# Altium PCB WDUExtensionBoard.PcbDoc
Units mm, origin at the board's own origin, x right, y up, seen from the top; angles counter-clockwise.
Board outline 97 x 22 mm, 2 copper layers (Top Layer, Bottom Layer); 36 components, 40 nets, 141 pads, 24 vias.
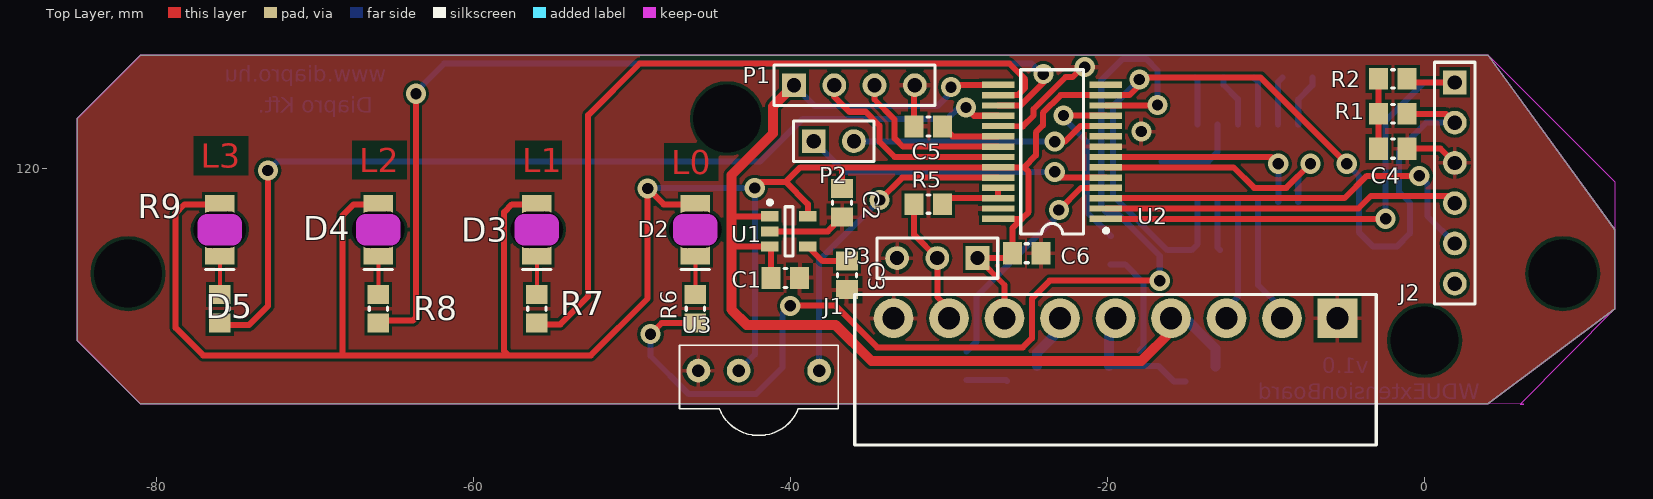
[diagram p0: Top Layer view]
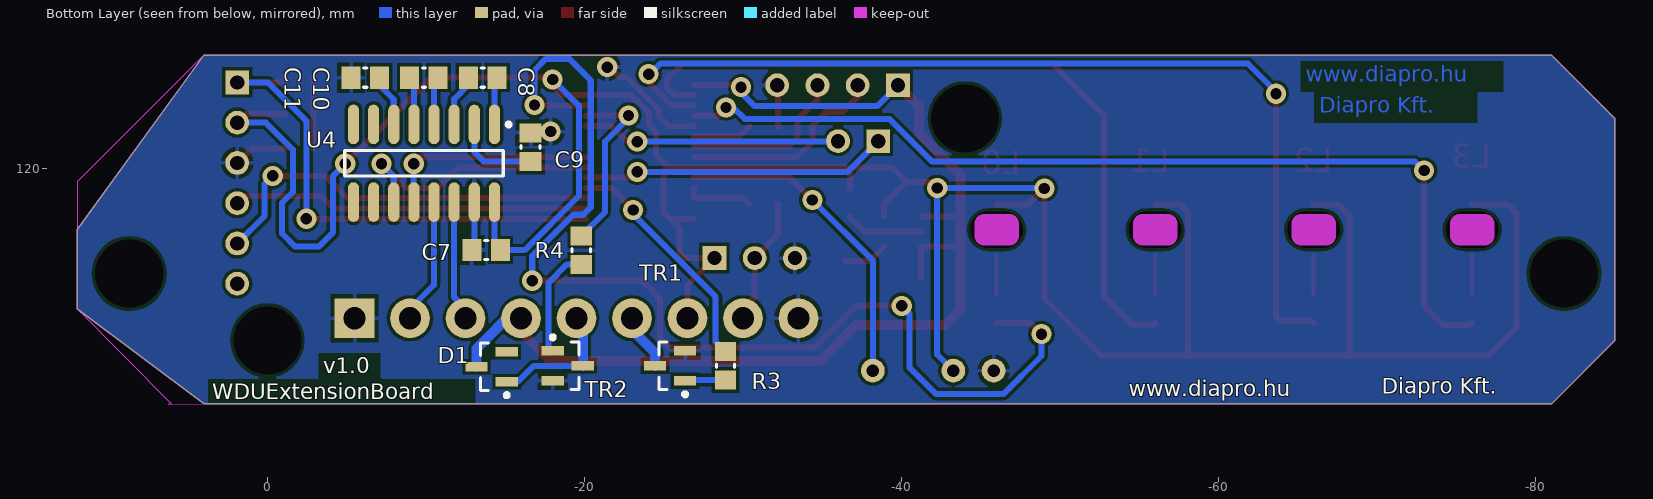
[diagram p1: Bottom Layer view, seen from below]

## Layer stack, top to bottom
Top Layer: signal copper 0.0356
Dielectric: dielectric 0.32, FR-4, Dk 4.8
Bottom Layer: signal copper 0.0356

## Board outline
-85,109.123 -85,123.123 -81,127.123 4,127.123 12,116.123 12,111.123 4,105.123 -81,105.123

## Design rules (kind name [scope] priority, off if disabled: settings)
AssemblyTestPointUsage [All] p1: valid=2
Clearance [Not OnLayer('Keep-Out Layer') vs Not OnLayer('Keep-Out Layer')] p1: gap=0.2
ComponentClearance [All] p1: gap=0 collisioncheckmode=3 verticalgap=0.254 showdistances=TRUE
FabricationTestpoint [All] p1 off: side=3 testpointundercomponent=TRUE minsize=1.016 maxsize=2.54 preferedsize=1.524 minholesize=0 maxholesize=1.016 preferedholesize=0.813 testpointgrid=0.025 allowsidetop=TRUE allowsidebottom=TRUE usegrid=TRUE gridtolerance=0
HoleSize [All] p1: absolutevalues=TRUE maxlimit=3.6 minlimit=0.025 maxpercent=80.000 minpercent=20.000
MinimumSolderMaskSliver [All] p1: minsoldermaskwidth=0
PolygonConnect [All] p1: connectstyle=Relief reliefconductorwidth=0.254 reliefentries=4 polygonreliefangle="90 Angle"
RoutingVias [All] p1: holewidth=0.254 width=0.762 viastyle="Through Hole" minholewidth=0.254 minwidth=0.762 maxholewidth=2.54 maxwidth=2.54
SilkToSilkClearance [All] p1: silktosilkclearance=0.1
SilkscreenOverComponentPads [IsPad] p1: minsilkscreentomaskgap=0.1
SolderMaskExpansion [All] p1: expansion=0.102
Width [All] p1: maxlimit=1.2 minlimit=0.254 preferedwidth=0.254 minimp=50.000000 maximp=50.000000 favimp=50.000000
21 further rules are at their usual default settings.

## Components (designator, comment, footprint, x,y, rotation, side; value= is the part's Value field where it differs from the comment)
C1 "CAP" "0805 CAP" -40.32,113.073 r180 top
C2 "CAP" "0805 CAP" -36.75,117.803 r90 top
C3 "CAP" "0805 CAP" -36.44,113.233 r90 top
C4 "CAP" "0805 CAP" -2,121.223 r180 top
C5 "CAP" "0805 CAP" -31.3,122.623 r180 top
C6 "CAP" "0805 CAP" -25.1,114.623 r180 top
C7 "CAP" "0805 CAP" -13.8,114.823 r0 bottom
C8 "CAP" "0805 CAP" -13.578,125.701 r180 bottom
C9 "CAP" "0805 CAP" -16.6,121.323 r90 bottom
C10 "CAP" "0805 CAP" -9.878,125.701 r0 bottom
C11 "CAP" "0805 CAP" -6.178,125.701 r0 bottom
D1 "BAV99" SOT23 -14.15,107.473 r0 bottom
D2 "LED 0" "1206 LED Reversed" -46,116.107 r90 top
D3 "LED 1" "1206 LED Reversed" -56,116.107 r90 top
D4 "LED 2" "1206 LED Reversed" -66,116.107 r90 top
D5 "LED 3" "1206 LED Reversed" -76,116.107 r90 top
J1 "OUTPUT" "Euroblock 3.5pitch 9P" -5.5,110.523 r180 top
J2 "PIC_Kit" HDR1X6 1.9,125.403 r270 top
P1 "USB" HDR1X4 -39.78,125.223 r0 top
P2 "Watchdog" HDR1X2 -38.54,121.693 r0 top
P3 "Ext" HDR1X3 -28.2,114.323 r180 top
R1 "RES" "0805 RES" -2,123.423 r0 top
R2 "RES" "0805 RES" -2,125.623 r180 top
R3 "RES" "0805 RES" -28.9,107.523 r90 bottom
R4 "RES" "0805 RES" -19.8,114.823 r90 bottom
R5 "RES" "0805 RES" -31.3,117.723 r0 top
R6 "RES" "0805 RES" -46,111.123 r270 top
R7 "RES" "0805 RES" -56,111.123 r270 top
R8 "RES" "0805 RES" -66,111.123 r270 top
R9 "RES" "0805 RES" -76,111.123 r270 top
TR1 "BC846" SOT23 -25.4,107.523 r0 bottom
TR2 "BC846" SOT23 -18.95,107.523 r180 bottom
U1 "LP3985IM5-3.3" MF05A_N -40.1,116.003 r0 top
U2 "PIC24FJ64GB002-I/SO" SSOP-28 -23.5,121.023 r90 top
U3 "TSOP1736" TSOP17xx -42,107.223 r0 top
U4 "MAX3232CSE" NSO16_M -9.878,120.301 r270 bottom

## Footprints (in the part's own frame and the unit in brackets; to place one, negate y for a bottom-side part, rotate by r counter-clockwise, add the part's x,y. Pads: shape width x height; smd on the part's side, far side on the other; paste and mask are expansions set on the pad)
"0805 CAP" [mm] "Chip Capacitor, 2-Leads, Body 2,0x1,3mm, IPC Medium Density"
  rect 1.2x1.4 smd: 1(-0.9,0) 2(0.9,0)
  silkscreen extent -0.1,-0.6 0.1,0.6, body extent -1.05,-0.67 1.05,0.67, height 1
"0805 RES" [mm] "Chip Resistor, 2-Leads, Body 2,0x1,3mm, IPC Medium Density"
  rect 1.2x1.35 smd: 1(-0.9,0) 2(0.9,0)
  silkscreen extent -0.1,-0.58 0.1,0.58, body extent -1.05,-0.67 1.05,0.67, height 1
"1206 LED Reversed" [mm] "1206 Green LED"
  rect 1.2x1.85 smd: 1(1.6,0) 2(-1.6,0)
  Keep-Out Layer lines w1.2: -0.4,0.8 -0.4,-0.8 0.4,-0.8 0.4,0.8 -0.4,0.8
  silkscreen extent -2.5,-0.9 -2.5,0.9, body extent -1.6,-0.8 1.6,0.8, height 0.5
"Euroblock 3.5pitch 9P" [mm] "3.5 mm pitch 9P connector"
  rect 2.5x2.5 hole 1.4: 1(0,0)
  round 2.5 hole 1.4 mask+0.102: 2(3.5,0) 3(7,0) 4(10.5,0) 5(14,0) 6(17.5,0) 7(21,0) 8(24.5,0) 9(28,0)
  silkscreen extent -2.45,-1.5 30.45,8, body extent -2.45,-1.5 30.45,8, height 7.2
HDR1X2 [mm] "Connector; Header; 2 Position"
  rect 1.5x1.5 hole 0.9: 1(0,0)
  round 1.5 hole 0.9: 2(2.54,0)
  silkscreen extent -1.27,-1.27 3.81,1.27
HDR1X3 [mm] "Connector; Header; 3 Position"
  rect 1.5x1.5 hole 0.9: 1(0,0)
  round 1.5 hole 0.9: 2(2.54,0) 3(5.08,0)
  silkscreen extent -1.27,-1.27 6.35,1.27
HDR1X4 [mm] "Connector; Header; 4 Position"
  rect 1.5x1.5 hole 0.9: 1(0,0)
  round 1.5 hole 0.9: 2(2.54,0) 3(5.08,0) 4(7.62,0)
  silkscreen extent -1.27,-1.27 8.89,1.27
HDR1X6 [mm] "Connector; Header; 6 Position"
  rect 1.5x1.5 hole 0.9: 1(0,0)
  round 1.5 hole 0.9: 2(2.54,0) 3(5.08,0) 4(7.62,0) 5(10.16,0) 6(12.7,0)
  silkscreen extent -1.27,-1.27 13.97,1.27
MF05A_N [mm] "SOT23, 5-Leads, Body 2.9x1.6mm, Pitch 0.95mm, Lead Span 2.8mm, IPC Medium Density"
  rect 1.1x0.65 smd: 1(-1.2,0.95) 2(-1.2,0) 3(-1.2,-0.95) 4(1.2,-0.95) 5(1.2,0.95)
  silkscreen extent -1.32,-1.55 0.25,1.95, body extent -0.9,-1.55 0.9,1.55, height 1.19
NSO16_M [mm] "SOIC, 16-Leads, Body 9.9x3.9mm, Pitch 1.27mm, IPC Low Density"
  oval 2.5x0.7 smd: 1(-2.45,4.445) 2(-2.45,3.175) 3(-2.45,1.905) 4(-2.45,0.635) 5(-2.45,-0.635) 6(-2.45,-1.905) 7(-2.45,-3.175) 8(-2.45,-4.445) 9(2.45,-4.445) 10(2.45,-3.175) 11(2.45,-1.905) 12(2.45,-0.635) 13(2.45,0.635) 14(2.45,1.905) 15(2.45,3.175) 16(2.45,4.445)
  silkscreen extent -2.57,-5 0.8,5.47, body extent -2,-5 2,5, height 1.75
SOT23 [mm] "SOT23, 3-Leads, Body 3,0x2,5mm (max), Pitch 0,95mm, IPC Medium Density"
  rect 1.4x0.6 smd: 1(-0.95,0.95) 2(-0.95,-0.95) 3(0.95,0)
  silkscreen extent -1.07,-1.5 0.7,1.92, body extent -0.7,-1.5 0.7,1.5, height 1.1
SSOP-28 [mm] "SSOP, Plastic; 28 Leads; Body Width 5.2 mm; Pitch 0.65 mm"
  rect 0.4x2.05 smd: 1(-4.225,-3.4) 2(-3.575,-3.4) 3(-2.925,-3.4) 4(-2.275,-3.4) 5(-1.625,-3.4) 6(-0.975,-3.4) 7(-0.325,-3.4) 8(0.325,-3.4) 9(0.975,-3.4) 10(1.625,-3.4) 11(2.275,-3.4) 12(2.925,-3.4) 13(3.575,-3.4) 14(4.225,-3.4) 15(4.225,3.4) 16(3.575,3.4) 17(2.925,3.4) 18(2.275,3.4) 19(1.625,3.4) 20(0.975,3.4) 21(0.325,3.4) 22(-0.325,3.4) 23(-0.975,3.4) 24(-1.625,3.4) 25(-2.275,3.4) 26(-2.925,3.4) 27(-3.575,3.4) 28(-4.225,3.4)
  silkscreen extent -5.18,-3.52 5.17,1.98, body extent -5.1,-2.7 5.1,2.7, height 2
TSOP17xx [mm] "TSOP17xx IR Receiver"
  round 1.5 hole 0.8: 1(-3.81,0) 2(-1.27,0) 3(3.81,0)
  silkscreen extent -5,-4.09 5,1.6, body extent -5,-4.1 5,1.6, height 13.3

## Part data
C1 C2 C3 C4 C5 C6 C7 C8 C9 C10 C11: "Capacitor"
D1: "Dual Schottky series - 0.2A, 75V"
D2 D3 D4 D5: library part LED2, "Typical RED, GREEN, YELLOW, AMBER GaAs LED"
J1: library part "Euroblock 9P connector"
J2: "PIC Kit connector"
P1: library part "Header 4", "Header, 4-Pin"
P2: library part "Header 2", "Header, 2-Pin"
P3: library part "Header 3", "Header, 3-Pin"
R1 R2 R3 R4 R5 R6 R7 R8 R9: "Resistor"
TR1 TR2: "NPN Transistor, 80 V, SOT23"
U1: "Micropower, 150mA Low-Noise Ultra Low-Dropout CMOS Voltage Regulator"
U2: "16-Bit Flash Microcontroller with USB On-The-Go and nanoWatt XLP, 64KB Flash, 8KB SRAM, 28-Pin SOIC, Industrial Temperature"
U3: library part TSOP17xx, "IR Receiver, 3-Pin"
U4: "3.0V TO 5.5V, Low-Power, up to 1Mbps, True RS-232 Transceiver Using Four 0.1µF External Capacitor"

## Free pads (board coordinates)
  round 1.524 hole 4.3: 0(-81.79,113.343) 0(-44,123.123) 0(0,109.123) 0(8.71,113.343)
  oct 2x1.524 hole 2.3 slot 3.3 at 0.7 deg: 0(-76,116.107) 0(-66,116.107) 0(-56,116.107) 0(-46,116.107)

## Via types
v1: diameter 1.27, hole 0.711, Top Layer to Bottom Layer, 24 vias

## Nets (pads, with @x,y where several pads share a name; then routed paths per layer and width w, separated by ;. In a path a pad name is that pad's centre, name@x,y a point inside that pad or via, vN(x,y) a via of type N, cw(c..) or ccw(c..) an arc to the next point about the centre after c; other vN are vias at no path point)
D+: P1.3 U2.21 | length 10.6
  Top Layer w0.381: P1.3 -34.7,124.323 -33.43,123.053 -33.43,121.873 -32.905,121.348 U2.21
D-: P1.2 U2.22 | length 13.2
  Top Layer w0.381: P1.2 -37.24,124.503 -36.289,123.552 -35.259,123.552 -34.386,122.679 -34.386,121.649 -33.435,120.698 U2.22
DAT: J1.8 P3.2 R5.1 | length 7.5
  Top Layer w0.381: R5.1 -32.2,115.783 P3.2 -30.74,111.863 J1.8@-30,111.123
GND: C1.1 C2.1 C3.1 C4.1 C5.2 C6.1 C7.2 C9.2 C11.2 J1.1 J1.9 J2.3 P1.4 P3.3 TR1.2 TR2.2 U1.2 U2.8 U2.19 U2.27 U3.1 U4.15 | length 21.2
  Top Layer w0.381: U1.2 -37.65,116.003 C2.1 ; C5.2 -32.2,125.183 P1.4 ; U2.19 -25.34,122.633 -24.661,123.312 -24.661,123.724 -22.642,125.743 -22.21,125.743 -21.59,126.363 v1(-21.44,126.363) ; C4.1 1,121.223 J2.3
  Bottom Layer w0.381: U4.15 -13.053,114.976 C7.2
  other v1: -17.868,122.301
"INFRA IN": U2.24 U3.3 | length 20.4
  Top Layer w0.381: v1(-34.378,117.983) -32.963,119.398 U2.24
  Bottom Layer w0.381: U3.3 -38.19,114.171 v1(-34.378,117.983)
IR: R3.2 U2.4 | length 14.9
  Top Layer w0.381: v1(-23.075,117.348) -21.675,118.748 U2.4
  Bottom Layer w0.381: R3.2 -28.282,109.041 -28.282,111.887 -23.075,117.094 v1(-23.075,117.348)
IR_OUT: J1.6 TR1.3 | length 4.2
  Bottom Layer w0.635: TR1.3 -24.45,108.353 -23,109.803 J1.6@-23,111.123
LED_0: R6.2 U2.12 | length 71
  Top Layer w0.381: v1(-48.832,109.521) -48.13,110.223 R6.2 ; v1(-40.02,111.307) -40.02,111.333 -37.17,111.333 -34.53,108.693 -25.34,108.693 -24.78,109.253 -24.78,111.763 -23.65,112.893 v1(-16.71,112.893) ; U2.12 -16.825,123.948 v1(-16.85,123.973)
  Bottom Layer w0.381: v1(-48.832,109.521) -48.832,108.145 -46.44,105.753 -42.17,105.753 -40.51,107.413 -40.51,110.817 v1(-40.02,111.307) ; v1(-16.85,123.973) -16.85,126.162 -17.57,126.883 -19.05,126.883 -20.4,125.533 -20.4,117.523 -19.93,117.053 -19.303,117.053 -16.71,114.46 v1(-16.71,112.893) v1@-16.34,112.893
LED_1: R7.2 U2.16 | length 47.2
  Top Layer w0.381: R7.2 -55.92,110.143 -54.52,110.143 -52.76,111.903 -52.76,123.343 -49.51,126.593 -26.2,126.593 -25.2,125.593 -25.2,125.055 -25.657,124.598 U2.16
LED_2: R8.2 U2.17 | length 61.5
  Top Layer w0.381: R8.2 -65.83,110.393 -63.81,110.393 -63.63,110.573 v1(-63.63,124.683) ; U2.17 -25.485,123.948 -24.03,125.403 -24.03,125.623 -23.95,125.703 v1@-23.95,125.743
  Bottom Layer w0.381: v1(-63.63,124.683) -63.71,124.683 -63.71,124.733 -61.86,126.583 -24.79,126.583 v1@-23.95,125.743
  other v1: -24.05,125.923
LED_3: R9.2 U2.18 | length 60.1
  Top Layer w0.381: R9.2 -75.87,110.093 -74.17,110.093 -72.95,111.313 -72.95,119.863 v1(-72.97,119.843) ; v1(-28.93,123.813) -28.415,123.298 U2.18
  Bottom Layer w0.381: v1(-72.97,119.843) -72.97,119.823 -72.39,120.403 -41.93,120.403 -39.23,123.103 -30.11,123.103 -29.4,123.813 v1(-28.93,123.813)
M\C\L\R\: J2.1 R2.1 U2.1 | length 32.3
  Top Layer w0.381: U2.1 v1(-2.459,116.798) ; R2.1 -0.88,125.403 J2.1
  Bottom Layer w0.381: v1(-2.459,116.798) -2.459,122.978 -0.034,125.403 J2.1
NetC3_2: C3.2 U1.4 | length 2.8
  Top Layer w0.381: U1.4 -37.98,114.133 C3.2
NetC4_2: C4.2 R1.1 R2.2 | length 4.4
  Top Layer w0.381: C4.2 R2.2
NetC5_1: C5.1 U2.20 | length 3.8
  Top Layer w0.381: C5.1 -29.775,121.998 U2.20
NetC8_1: C8.1 U4.3 | length 3.3
  Bottom Layer w0.381: C8.1 -12.678,125.239 -11.783,124.344 U4.3
NetC8_2: C8.2 U4.1 | length 3
  Bottom Layer w0.381: C8.2 -14.323,125.546 U4.1
NetC9_1: C9.1 U4.2 | length 5.5
  Bottom Layer w0.381: C9.1 -13.65,120.423 -13.053,121.02 U4.2
NetC10_1: C10.1 U4.4 | length 3.1
  Bottom Layer w0.381: C10.1 -10.513,125.436 U4.4
NetC10_2: C10.2 U4.5 | length 3.1
  Bottom Layer w0.381: U4.5 -9.243,125.436 C10.2
NetC11_1: C11.1 U4.6 | length 3.3
  Bottom Layer w0.381: U4.6 -7.973,124.322 -7.078,125.217 C11.1
NetD2_2: D2.2 R6.1 | length 2.5
  Top Layer w0.254: R6.1 D2.2
NetD3_2: D3.2 R7.1 | length 2.5
  Top Layer w0.254: R7.1 D3.2
NetD4_2: D4.2 R8.1 | length 2.5
  Top Layer w0.254: R8.1 D4.2
NetD5_2: D5.2 R9.1 | length 2.5
  Top Layer w0.254: R9.1 D5.2
NetR3_1: R3.1 TR1.1 | length 2.6
  Bottom Layer w0.381: R3.1 -26.4,106.623 TR1.1
NetR4_1: R4.1 TR2.1 | length 6.9
  Bottom Layer w0.381: R4.1 -18.888,113.923 -17.741,112.776 -17.741,108.732 TR2.1
NetR5_2: R5.2 U2.25 U2.26 | length 4.3
  Top Layer w0.381: R5.2 -30.025,118.098 U2.26 U2.25
PGEC: J2.5 U2.3 | length 25.5
  Top Layer w0.381: U2.3 -5.053,118.098 -3.644,119.507 v1(-0.342,119.507)
  Bottom Layer w0.381: v1(-0.342,119.507) 0.166,118.999 0.166,116.977 J2.5
PGED: J2.4 U2.2 | length 22.5
  Top Layer w0.381: U2.2 -4.179,117.448 -3.39,118.237 1.446,118.237 J2.4
REL: R4.2 U2.11 | length 11.8
  Top Layer w0.381: v1@-22.948,123.317 -20.119,123.317 U2.11
  Bottom Layer w0.381: v1@-22.948,123.317 -21.297,121.666 -21.297,117.22 R4.2
  other v1: -22.778,123.317
REL_OUT: D1.1 J1.5 TR2.3 | length 9
  Bottom Layer w0.381: TR2.3 -16.806,107.523 -15.806,106.523 D1.1
  Bottom Layer w0.635: TR2.3 -19.9,110.723 J1.5@-19.5,111.123
RXD: U2.7 U4.12 | length 13.5
  Top Layer w0.381: U2.7 -9.661,120.698 v1(-9.232,120.269)
  Bottom Layer w0.381: U4.12 -9.232,117.862 v1(-9.232,120.269)
RXDH_2: J1.2 U4.13 | length 7.4
  Bottom Layer w0.381: U4.13 -10.513,112.636 J1.2@-9,111.123
TXD: U2.6 U4.11 | length 16.8
  Top Layer w0.381: U2.6 -12.059,120.048 -10.756,118.745 -8.724,118.745 v1(-7.2,120.269)
  Bottom Layer w0.381: U4.11 -7.973,119.496 v1(-7.2,120.269)
TXDH_3: J1.3 U4.14 | length 7
  Bottom Layer w0.381: J1.3@-12.5,111.123 -11.783,111.84 U4.14
VCC3.3V: C2.2 C6.2 C7.1 D2.1 D3.1 D4.1 D5.1 J1.7 J2.2 P3.1 R1.2 U1.5 U2.13 U2.23 U2.28 U3.2 U4.16 | length 195.8
  Top Layer w0.381: D5.1 -78.226,117.707 -78.78,117.153 -78.78,109.913 -77.05,108.183 -68.25,108.183 ; D4.1 -67.556,117.707 -68.25,117.013 -68.25,108.183 ; D3.1 -57.576,117.707 -58.06,117.223 -58.06,108.453 -57.79,108.183 ; D2.1 -48.004,117.707 v1(-49.01,118.713) -49.01,111.773 -52.6,108.183 -57.79,108.183 ; v1@-42.5,118.497 v1(-42.252,118.745) -41.874,119.123 -40.3,119.123 ; U1.5 -38.9,117.723 -40.3,119.123 ; C2.2 -36.75,120.048 ; J1.7@-26.9,111.523 -26.5,111.123 -26.5,112.623 P3.1 -26.3,114.323 C6.2 -26,116.201 -25.403,116.798 ; U2.28 -25.403,116.798 ; v1(-4.914,120.269) -10.368,125.723 -17.494,125.723 -18.619,124.598 U2.13 -22.965,124.598 -24.08,123.483 -24.08,122.693 -24.52,122.253 -24.52,120.795 -25.267,120.048 ; R1.2 1.34,123.423 J2.2 ; -68.25,108.183 -57.79,108.183 ; -40.3,119.123 -39.375,120.048 -36.75,120.048 ; -36.75,120.048 U2.23 -25.267,120.048 ; -25.403,116.798 -24.98,117.221 -24.98,119.761 -25.267,120.048
  Bottom Layer w0.381: v1(-49.01,118.713) -48.978,118.745 v1(-42.252,118.745) -42.252,108.241 U3.2 ; v1(-17.995,125.587) -19.646,123.936 -19.646,118.237 -16.232,114.823 C7.1 -14.323,115.2 U4.16 ; v1(-4.914,120.269) -4.152,119.507 -4.152,115.951 -3.263,115.062 -1.739,115.062 -0.923,115.878 -0.923,117.802 -1.612,118.491 -1.612,121.158 0.093,122.863 J2.2
VCC5V: C1.2 D1.3 J1.4 P1.1 U1.1 U1.3 U2.15 | length 73.2
  Top Layer w0.381: -43.72,115.193 -43.58,115.053 U1.3 -41.22,114.973 C1.2 ; -43.72,116.933 -43.7,116.953 U1.1 ; v1@-29.87,125.248 U2.15
  Top Layer w0.635: P1.1 -41.109,123.894 -41.109,122.174 -43.72,119.563 -43.72,116.933 -43.72,115.193 -43.72,111.069 -42.76,110.109 -37.172,110.109 -34.886,107.823 -17.868,107.823 -16,109.691 J1.4@-16,111.123
  Bottom Layer w0.381: P1.1 -38.46,123.903 -36.531,123.903 -32.63,123.903 -30.744,123.903 -29.87,124.777 v1@-29.87,125.253
  Bottom Layer w0.635: J1.4@-16,111.123 -15.707,111.123 -13.2,108.616 D1.3
  other v1: -29.88,125.103
WD_IN: P2.1 U2.5 | length 19.4
  Top Layer w0.381: v1(-23.329,119.761) -22.966,119.398 U2.5
  Bottom Layer w0.381: P2.1 -36.608,119.761 v1(-23.329,119.761)
WD_OUT: P2.2 U2.10 | length 15.5
  Top Layer w0.381: v1(-23.329,121.666) -22.694,121.666 -21.712,122.648 U2.10
  Bottom Layer w0.381: -35.243,121.666 v1(-23.329,121.666)
pads on no net: D1.2 J2.6 U2.9 U2.14 U4.7 U4.8 U4.9 U4.10

## Polygon pours and split planes (outlines as drawn)
GND on Top Layer "Bottom Layer-No Net" (solid, pour order 8): 4.01,127.109 12,119.119 12,116.093 11.99,116.083 11.99,111.116 6.005,105.131 4.01,105.131 4.008,105.133 -81.01,105.133 -85,109.123 -85,109.163 -84.99,109.173 -84.99,123.133 -81,127.123 -80.99,127.123
GND on Bottom Layer "Bottom Layer-No Net" (solid, pour order 9): 4.01,127.109 12,119.119 12,116.093 11.99,116.083 11.99,111.116 6.005,105.131 4.01,105.131 4.008,105.133 -81.01,105.133 -85,109.123 -85,109.163 -84.99,109.173 -84.99,123.133 -81,127.123 -80.99,127.123

## Keep-outs
Keep-Out Layer:
  pour cut-out: 12,116.123 4,127.123 12,119.133
  pour cut-out: 4,105.123 12,111.123 6.03,105.093 6.24,105.113
  lines w0.1: -85,109.123 -85,123.123 -81,127.123 4,127.123 12,116.123 12,111.123 4,105.123 -81,105.123 -85,109.123

## Other copper
Top Layer:
  text "L3" at -77.2,120.013 h1.52
  text "L2" at -67.2,119.733 h1.52
  text "L1" at -56.92,119.733 h1.52
  text "L0" at -47.53,119.623 h1.52
Bottom Layer:
  text "www.diapro.hu" at -65.5,125.433 h1
  text "Diapro Kft." at -66.35,123.503 h1
  text "v1.0" at -3.517,107.061 h1
  text "WDUExtensionBoard" at 3.468,105.41 h1

## Silkscreen, mask and mechanical layers (free items; w line width, h text height)
Bottom Overlay:
  text "v1.0" at -3.517,107.061 h1
  text "Diapro Kft." at -70.28,105.763 h1
  text "www.diapro.hu" at -54.32,105.613 h1
  text "WDUExtensionBoard" at 3.468,105.41 h1
Bottom Solder:
  text "v1.0" at -3.517,107.061 h1
  text "Diapro Kft." at -70.28,105.763 h1
  text "www.diapro.hu" at -54.32,105.613 h1
  text "WDUExtensionBoard" at 3.47,105.413 h1